# Altium PCB transmitter.PcbDoc
Units mil, origin at the board's own origin, x right, y up, seen from the top; angles counter-clockwise.
Board outline 6000 x 4000 mil, 2 copper layers (Top Layer, Bottom Layer), stack 61.811 mil thick; 10 components, 10 nets, 78 pads, 8 vias.
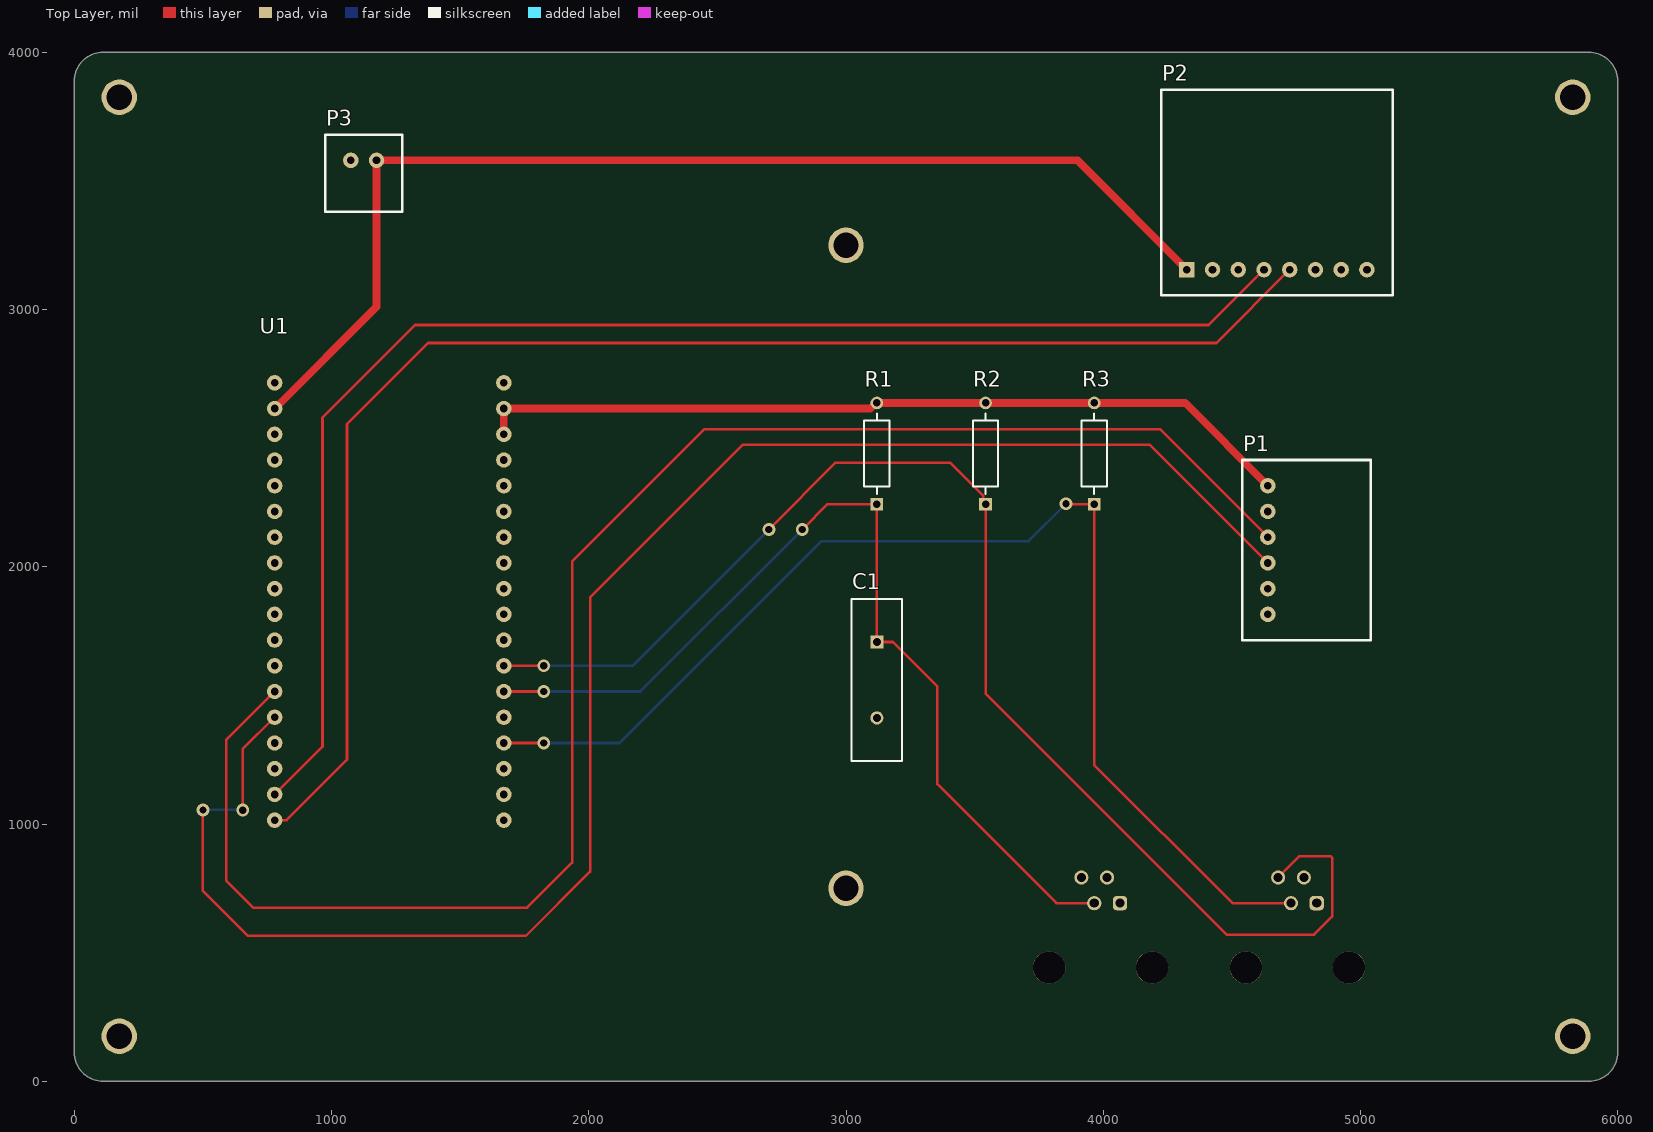
[diagram p0: Top Layer view]
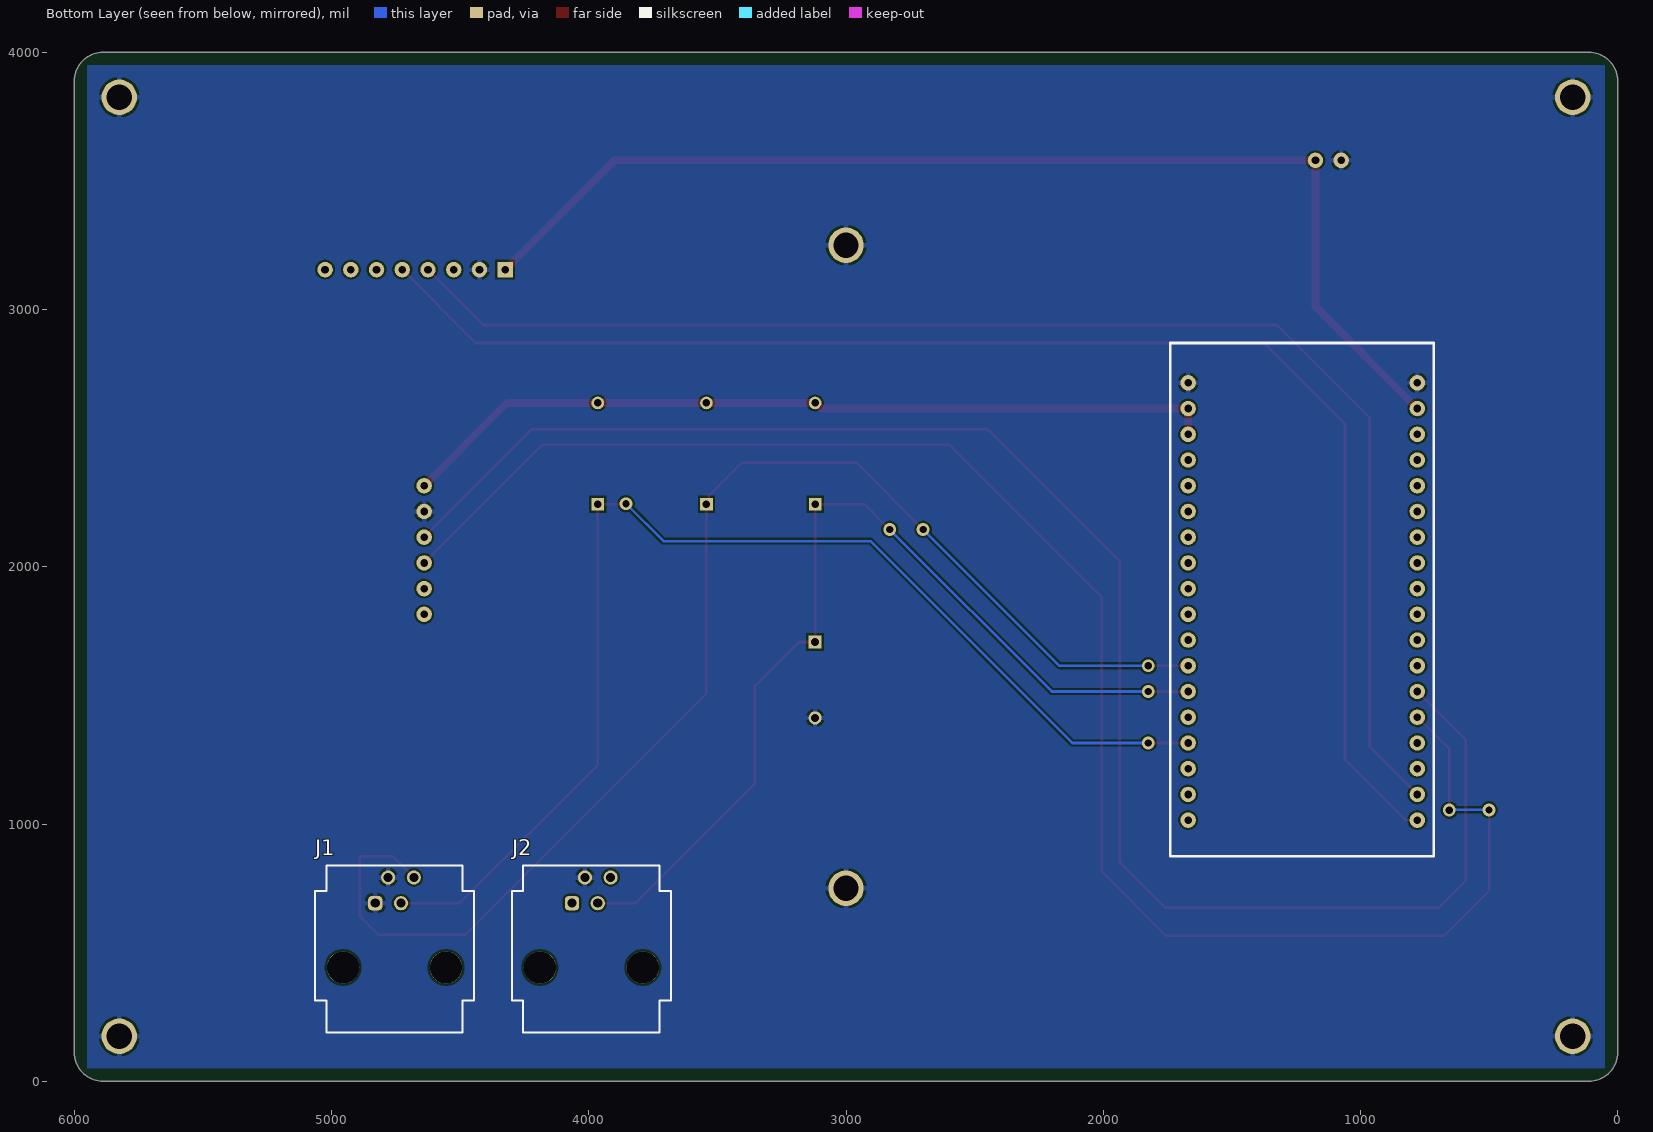
[diagram p1: Bottom Layer view, seen from below]
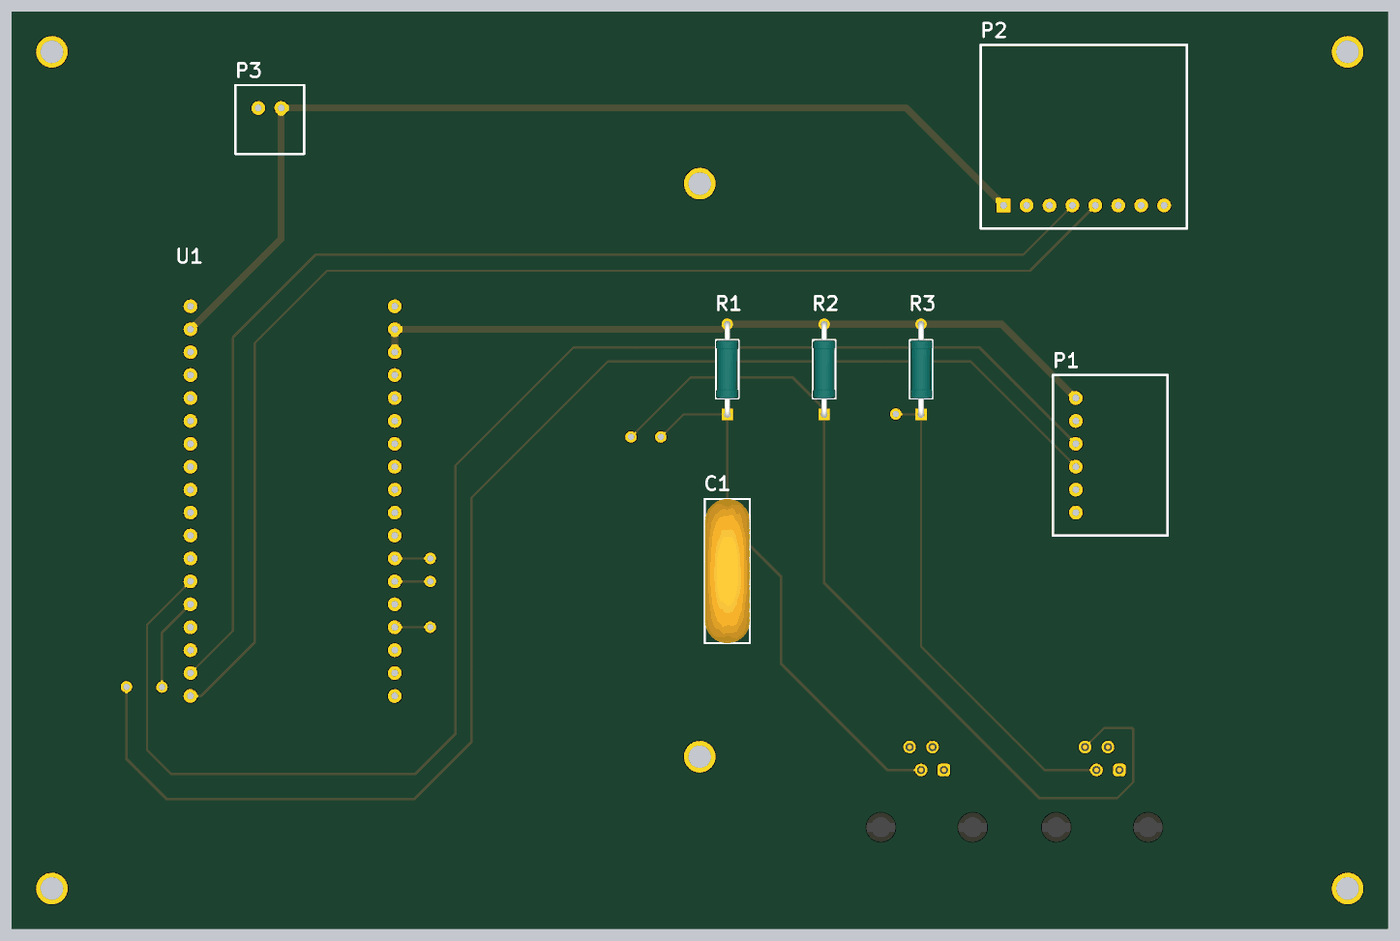
[diagram p2: 3D render of the assembled board from above, using the file's embedded part models]

## Layer stack, top to bottom
Top Solder: solder mask 0.5, Solder Resist, Dk 3.8
Top Layer: signal copper 1.378
Dielectric: core 59.0551, FR-4, Dk 4.5
Bottom Layer: signal copper 1.378
Bottom Solder: solder mask 0.5, Solder Resist, Dk 3.8

## Board outline
5888,0 ccw(c5888,112) 6000,112 6000,400 6000,3888 ccw(c5888,3888) 5888,4000 112,4000 ccw(c112,3888) 0,3888 0,112 ccw(c112,112) 112,0

## Design rules (kind name [scope] priority, off if disabled: settings)
BoardOutlineClearance [All] p1: gap=7.87 ignorepadtopadclearanceinfootprint=FALSE except(15.75: Arc-SplitBarrior Arc-SplitContinuation Track-SplitBarrior Track-SplitContinuation SMDPad-SplitBarrior SMDPad-SplitContinuation THPad-SplitBarrior THPad-SplitContinuation Via-SplitBarrior Via-SplitContinuation Fill-SplitBarrior Fill-SplitContinuation Poly-SplitBarrior Poly-SplitContinuation Region-SplitBarrior Region-SplitContinuation Text-SplitBarrior Text-SplitContinuation)
Clearance "Clearance Bottom Layer" [OnLayer('Bottom Layer')] p1: gap=8 ignorepadtopadclearanceinfootprint=TRUE except(10: Arc-Text Track-Text SMDPad-Text THPad-Text Via-Text Fill-Text Poly-Text Region-Text Text-Text)
Clearance "Clearance Top Layer" [OnLayer('Top Layer')] p2: gap=8 ignorepadtopadclearanceinfootprint=TRUE except(10: Arc-Text Track-Text SMDPad-Text THPad-Text Via-Text Fill-Text Poly-Text Region-Text Text-Text)
Clearance [All] p3: gap=7.87 ignorepadtopadclearanceinfootprint=FALSE except(3.5: Arc-Arc Arc-Track Arc-SMDPad Track-Track Track-SMDPad SMDPad-SMDPad; 5: Arc-Via Track-Via SMDPad-Via THPad-Via Via-Via; 10: Arc-Text Track-Text SMDPad-Text THPad-Text Via-Text Fill-Text Poly-Text Region-Text Text-Text)
HoleSize [All] p1: absolutevalues=TRUE maxlimit=248.03 minlimit=7.87 maxpercent=80.000 minpercent=20.000
MinimumAnnularRing [All] p1: minimumring=3
MinimumSolderMaskSliver [All] p1: minsoldermaskwidth=3.94
PolygonConnect PolygonConnect_1 [All] p1: thpad.connectstyle=Relief thpad.reliefconductorwidth=20 thpad.reliefentries=4 thpad.polygonreliefangle="90 Angle" thpad.airgapwidth=10 smdpad.connectstyle=Relief smdpad.reliefconductorwidth=20 smdpad.reliefentries=4 smdpad.polygonreliefangle="90 Angle" smdpad.airgapwidth=10 via.connectstyle=Direct via.reliefconductorwidth=20 via.reliefentries=4 via.polygonreliefangle="90 Angle" via.airgapwidth=10
RoutingCorners [All] p1: cornerstyle=Round minsetback=100 maxsetback=100
RoutingVias [All] p1: holewidth=19.68 width=39.37 viastyle="Through Hole" minholewidth=7.87 minwidth=17.72 maxholewidth=39.37 maxwidth=78.74
SilkToSilkClearance [All] p1: silktosilkclearance=3.94
SilkToSolderMaskClearance [IsPad] p1: minsilkscreentomaskgap=3.94 clearancetoexposedcopper=TRUE
SolderMaskExpansion [All] p1: expansion=4 istentingtop=FALSE
Width [All] p1: maxlimit=100 minlimit=3.5 preferedwidth=15
25 further rules are at their usual default settings.

## Components (designator, comment, footprint, x,y, rotation, side; value= is the part's Value field where it differs from the comment)
C1 "VY2103M63Y5US63V7" FP-VY2103M63Y5US63V7-MFG 3120,1560 r270 top
J1 "615004144121" 615004144121 4755,515 r180 bottom
J2 "615004144121" 615004144121 3990,515 r180 bottom
P1 "diymore_BME280_breakout" PCBComponent_1#1 4640,2315 r270 top
P2 "PMS5003_breakout" PCBComponent_1#2 4225,3055 r0 top
P3 "SolarManagerPort" PCBComponent_1#3 1175,3580 r180 top
R1 "MRS25000C1002FCT00" FP-MRS25-MFG 3120,2440 r90 top
R2 "MRS25000C1002FCT00" FP-MRS25-MFG 3542.5,2440 r90 top
R3 "MRS25000C1002FCT00" FP-MRS25-MFG 3965,2440 r90 top
U1 "Heltech_ESP32_WiFi_LoRa_V3" PCBComponent_1#4 1670,2715 r180 top

## Footprints (in the part's own frame and the unit in brackets; to place one, negate y for a bottom-side part, rotate by r counter-clockwise, add the part's x,y. Pads: shape width x height; smd on the part's side, far side on the other; paste and mask are expansions set on the pad)
615004144121 [mm] "Modular Jack Vertical Plastic 6P4C with Ears"
  rrect50% 1.4x1.4 hole 0.9: 1(-1.905,4.5)
  round 1.4 hole 0.9: 2(-0.635,7.04) 3(0.635,4.5) 4(1.905,7.04)
  round 3.2 hole 3.2 unplated: M1(-5.08,-1.85) M2(5.08,-1.85)
  silkscreen extent -7.85,-8.27 7.85,8.21, body extent -7.83,-8.27 7.83,8.21, height 16.41
FP-MRS25-MFG [mm]
  rect 1.25x1.25 hole 0.75 paste-2539.97 mask+0: 1(-5,0)
  round 1.25 hole 0.75 paste-2539.97 mask+0: 2(5,0)
  silkscreen extent -3.98,-1.25 3.98,1.25, body extent -5.72,-1.35 5.72,1.35, height 0.25
FP-VY2103M63Y5US63V7-MFG [mm]
  rect 1.3x1.3 hole 0.8 paste-2539.97 mask+0: 1(-3.75,0)
  round 1.3 hole 0.8 paste-2539.97 mask+0: 2(3.75,0)
  silkscreen extent -8,-2.5 8,2.5, body extent -8.1,-2.6 8.1,2.6, height 0.25
PCBComponent_1#1 [mil]
  round 60 hole 30: CSB(400,0) GND(100,0) SCL(200,0) SDA(300,0) SDO(500,0) VCC(0,0)
  silkscreen extent -100,-100 600,400
PCBComponent_1#2 [mil]
  round 60 hole 30: GND(200,100) NC1(700,100) NC2(800,100) RESET(600,100) RXD(400,100) SET(300,100) TXD(500,100)
  rect 60x60 hole 30: VCC(100,100)
  silkscreen extent 0,0 900,800
PCBComponent_1#3 [mil]
  round 60 hole 30: 5V(0,0) GND(100,0)
  silkscreen extent -100,-100 200,200
PCBComponent_1#4 [mil]
  round 60 hole 30: 1(0,1700) 2(0,1600) 3(0,1500) 4(0,1400) 5(0,1300) 6(0,1200) 7(0,1100) 8(0,1000) 9(0,900) 10(0,800) 11(0,700) 12(0,600) 13(0,500) 14(0,400) 15(0,300) 16(0,200) 17(0,100) 18(0,0) 19(891,1700) 20(891,1600) 21(891,1500) 22(891,1400) 23(891,1300) 24(891,1200) 25(891,1100) 26(891,1000) 27(891,900) 28(891,800) 29(891,700) 30(891,600) 31(891,500) 32(891,400) 33(891,300) 34(891,200) 35(891,100) 36(891,0)

## Part data
C1: library part CMP-02417-000049-1, "CAP CER 10000PF 440VAC Y5U RDL", Capacitance=10pF, Case/Package=Radial, Dielectric=Y5U, Max Operating Temperature=125°C, Min Operating Temperature=-40°C, Package Quantity=500, Resistor Type=Ceramic, Tolerance=20%, Voltage Rating (AC)=300V, Construction=RADIAL, Contact Plating=Tin, Depth=5mm, Height - Seated (Max)=0.787inch, Lead Diameter=0.6mm, Lead Free="Lead Free", Lead Length=30mm, Lead Pitch=7.5mm, Lead/Base Style=Kinked, Mount="Through Hole", Packaging=Bulk, Radiation Hardening=No, RoHS Compliant=Yes, Series=VY2, Termination=Radial, Voltage Rating (DC)=300V
J1 J2: library part CMP-1502-01722-2, Contact Resistance=20mΩ, Current Rating=1.5A, Insulation Resistance=500MΩ, Max Operating Temperature=85°C, Min Operating Temperature=-40°C, Operating Supply Voltage=120V, Contact Plating=Gold, Direction="User Selectable", Housing Material=PBT, Insulation Material=PBT, Mount="Through Hole", NexarPartId=19991158, Number of Ports=1, Number of Rows=1, Orientation=Vertical, RoHS=Compliant, Shielding=Unshielded, Termination=Solder
P3: library part Component_1
R1: library part CMP-00030-42632392-1, "MRS25000C1002FCT00 Resistor, 10 kOhm, ± 1%, 600 mW, Axial Leaded, Metal Film (Thin Film), Professional", Case/Package=Conformal, Max Operating Temperature=155°C, Max Power Dissipation=600mW, Min Operating Temperature=-55°C, Resistance=100k, Temperature Coefficient=50ppm/°C, Tolerance=1%, Voltage Rating=350V, Composition="Metal Film, Thin Film", Contact Plating=Tin, Diameter=2.5mm, Lead Free="Lead Free", Lead Length=26mm, Length=6.5mm, Military Standard=Not, Mount="Through Hole", NexarPartId=42632392, Number of Pins=2, Number of Terminations=2, Power Rating=600mW, Radiation Hardening=No, REACH SVHC=Unknown, RoHS=Compliant, Schedule B="8533210090, 8533210090", Termination=Axial, Voltage Rating (DC)=350V, Width=2.5mm
R2 R3: library part CMP-00030-42632392-1, "MRS25000C1002FCT00 Resistor, 10 kOhm, ± 1%, 600 mW, Axial Leaded, Metal Film (Thin Film), Professional", Case/Package=Conformal, Max Operating Temperature=155°C, Max Power Dissipation=600mW, Min Operating Temperature=-55°C, Resistance=10k, Temperature Coefficient=50ppm/°C, Tolerance=1%, Voltage Rating=350V, Composition="Metal Film, Thin Film", Contact Plating=Tin, Diameter=2.5mm, Lead Free="Lead Free", Lead Length=26mm, Length=6.5mm, Military Standard=Not, Mount="Through Hole", NexarPartId=42632392, Number of Pins=2, Number of Terminations=2, Power Rating=600mW, Radiation Hardening=No, REACH SVHC=Unknown, RoHS=Compliant, Schedule B="8533210090, 8533210090", Termination=Axial, Voltage Rating (DC)=350V, Width=2.5mm
U1: ComponentLink1Description="Product Page", ComponentLink1URL=https://heltec.org/project/wifi-lora-32-v3/

## Free pads (board coordinates)
  round 137.8 hole 98.43: PTH1(175,175) PTH2(175,3825) PTH3(5825,3825) PTH4(5825,175) PTH5(3000,3250) PTH6(3000,750)

## Via types
v1: diameter 50, hole 28, Top Layer to Bottom Layer, 8 vias

## Nets (pads, with @x,y where several pads share a name; then routed paths per layer and width w, separated by ;. In a path a pad name is that pad's centre, name@x,y a point inside that pad or via, vN(x,y) a via of type N, cw(c..) or ccw(c..) an arc to the next point about the centre after c; other vN are vias at no path point)
3V3: P1.VCC R1.2 R2.2 R3.2 U1.16 U1.17 | length 3212.4
  Top Layer w10: R1.2@3116.39,2636.85 R1.2
  Top Layer w30: U1.16 U1.17 3094.54,2615 R1.2@3116.39,2636.85 ; R1.2 R2.2 R3.2 4318.15,2636.85 P1.VCC
+5: P2.VCC P3.5V U1.35 | length 4455.1
  Top Layer w30: U1.35 1175,3011 P3.5V 3900,3580 P2.VCC
ANEM_B: J1.3 R3.1 U1.4 | length 4681.9
  Top Layer w10: U1.4 v1(1825,1315) ; v1(3855,2245) 3856.85,2243.15 R3.1 3965,1230 4502.83,692.17 J1.3
  Bottom Layer w10: v1(1825,1315) 2120,1315 2905,2100 3710,2100 v1(3855,2245)
BME_SCL: P1.SCL U1.24 | length 6536.6
  Top Layer w10: U1.24 590,1326 590,780 695,675 1760,675 1935,850 1935,2020 2450,2535 4220,2535 P1.SCL
BME_SDA: P1.SDA U1.23 | length 6700.9
  Top Layer w10: v1(500,1055) 500,740 675,565 1755,565 2005,815 2005,1880 2600,2475 4180,2475 P1.SDA ; v1(654.68,1053.81) 654.68,1290.68 U1.23
  Bottom Layer w10: v1(500,1055) 653.49,1055 v1(654.68,1053.81)
GND: C1.2 J1.1 J1.2 J2.2 P1.GND P2.GND P3.GND pad.PTH1 pad.PTH2 pad.PTH3 pad.PTH4 pad.PTH5 pad.PTH6 U1.18 U1.36
PMS_RX: P2.TXD U1.19 | length 5596.9
  Top Layer w10: U1.19 825,1015 1060,1250 1060,2555 1375,2870 4440,2870 P2.TXD
PMS_TX: P2.RXD U1.20 | length 5440.2
  Top Layer w10: U1.20 965,1301 965,2580 1325,2940 4410,2940 P2.RXD
RAIN_COUNT: C1.1 J2.3 R1.1 U1.6 | length 3775.3
  Top Layer w10: U1.6 v1(1825,1515) ; v1(2830,2145) 2928.15,2243.15 R1.1 C1.1 3182.36,1707.64 3355,1535 3355,1155 3817.83,692.17 J2.3
  Bottom Layer w10: v1(1825,1515) 2200,1515 v1(2830,2145)
VANE_OUT: J1.4 R2.1 U1.7 | length 5257.4
  Top Layer w10: U1.7 v1(1825,1615) ; v1(2700,2145) 2960,2405 3405,2405 3533.1,2276.9 3533.1,2252.55 R2.1 3542.5,1507.5 4480,570 4820,570 4890,640 4890,869.14 4884.14,875 4762.83,875 J1.4
  Bottom Layer w10: v1(1825,1615) 2170,1615 v1(2700,2145)
pads on no net: J1.M1 J1.M2 J2.1 J2.4 J2.M1 J2.M2 P1.CSB P1.SDO P2.NC1 P2.NC2 P2.RESET P2.SET U1.1 U1.2 U1.3 U1.5 U1.8 U1.9 U1.10 U1.11 U1.12 U1.13 U1.14 U1.15 U1.21 U1.22 U1.25 U1.26 U1.27 U1.28 U1.29 U1.30 U1.31 U1.32 U1.33 U1.34

## Polygon pours and split planes (outlines as drawn)
GND on Bottom Layer "GND_L02_P000" (solid, pour order 0): 50,50 50,3950 5950,3950 5950,50